# Altium PCB PCB_Gateway_RS232-Wifi_ESP8266.PcbDoc
Units mil, origin at the board's own origin, x right, y up, seen from the top; angles counter-clockwise.
Board outline 2130.91 x 3155.51 mil, 2 copper layers (Top Layer, Bottom Layer); 28 components, 22 nets, 104 pads, 6 vias.
Unrouted connection lines stored in the file: 1.
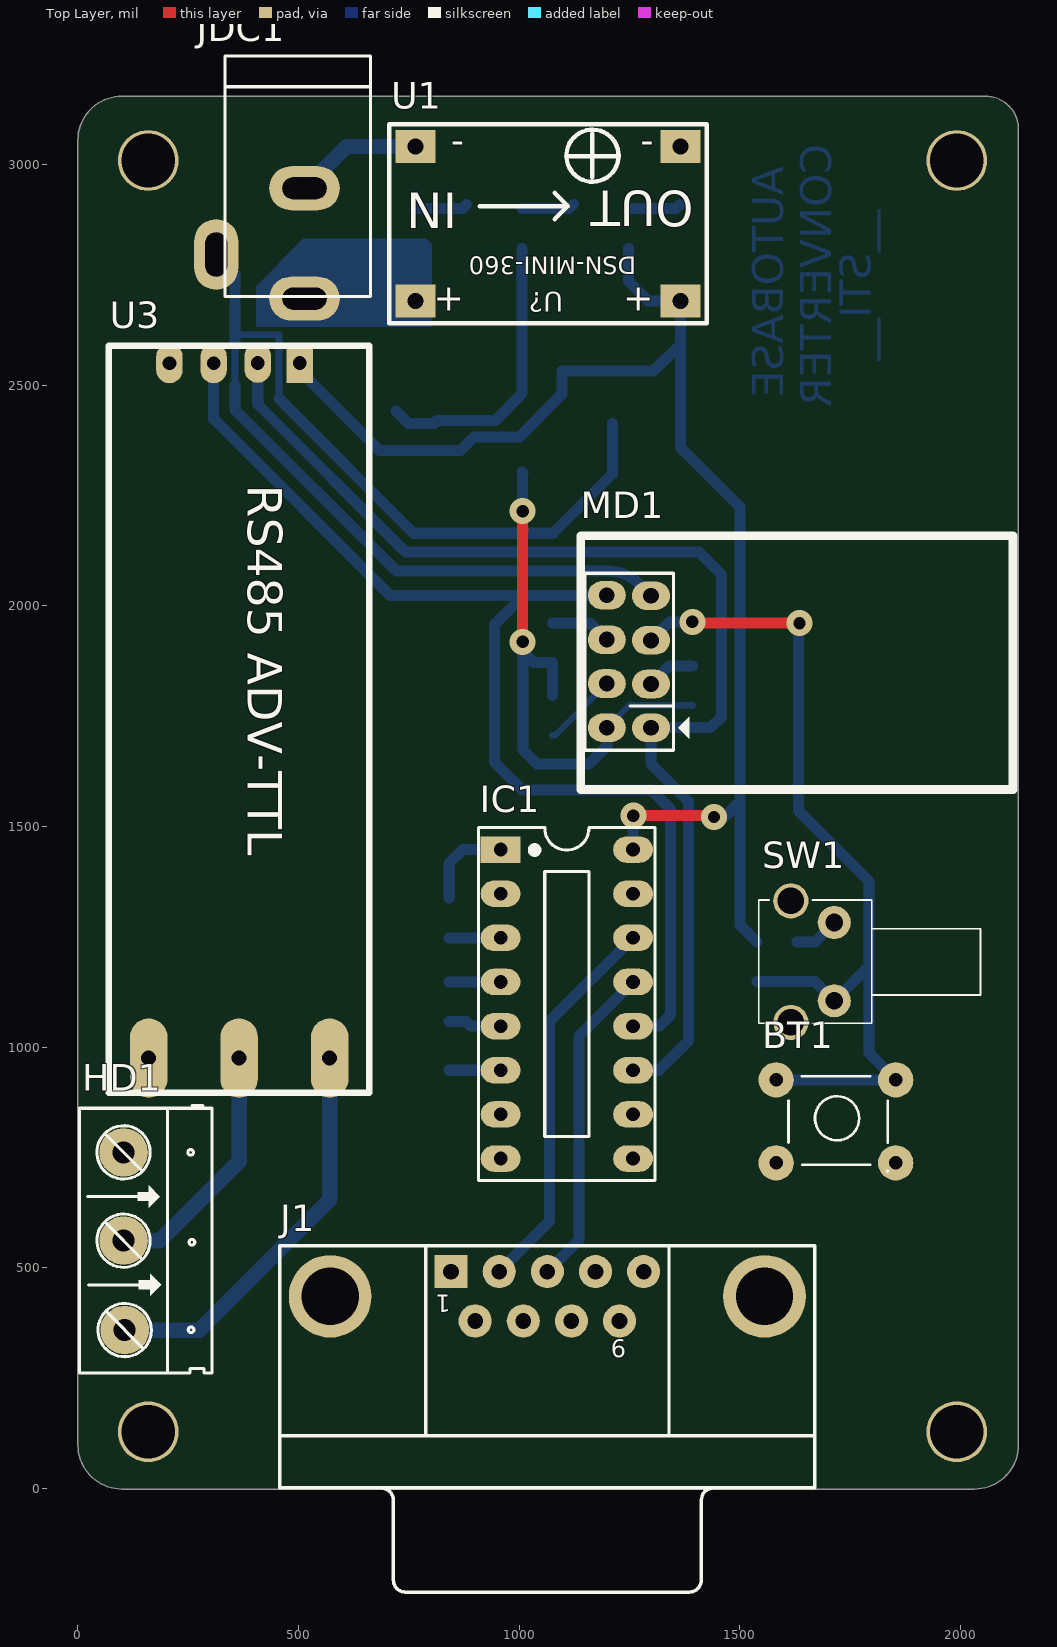
[diagram p0: Top Layer view]
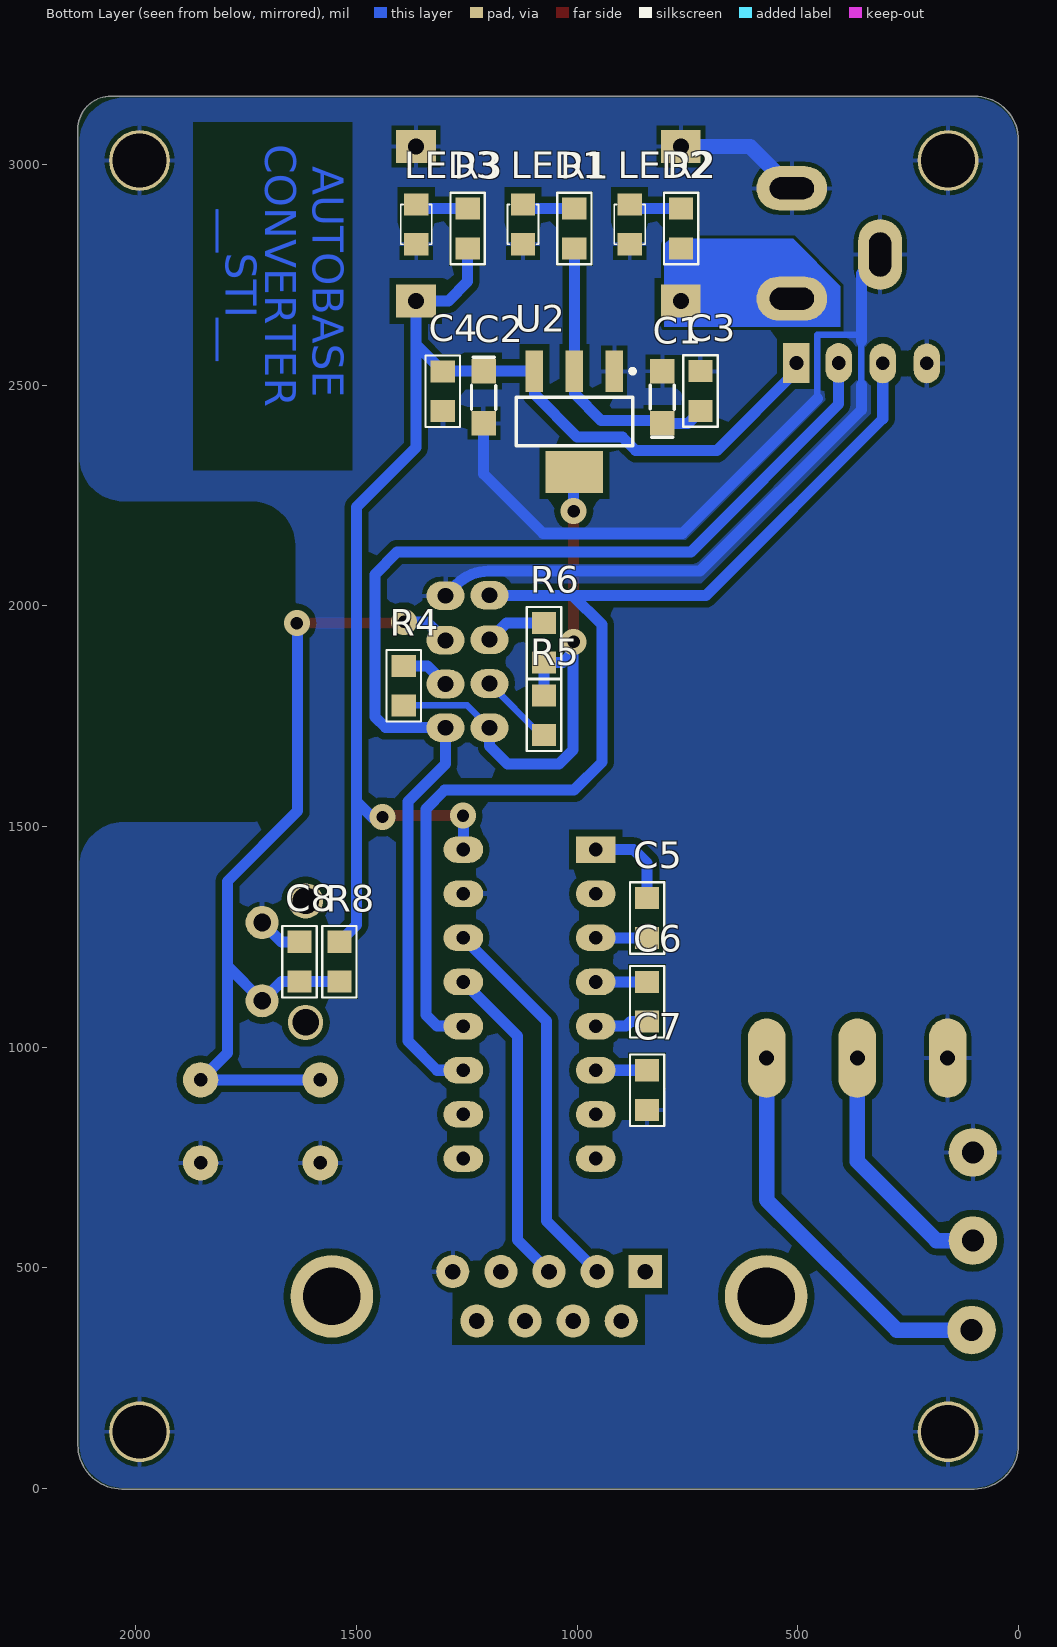
[diagram p1: Bottom Layer view, seen from below]
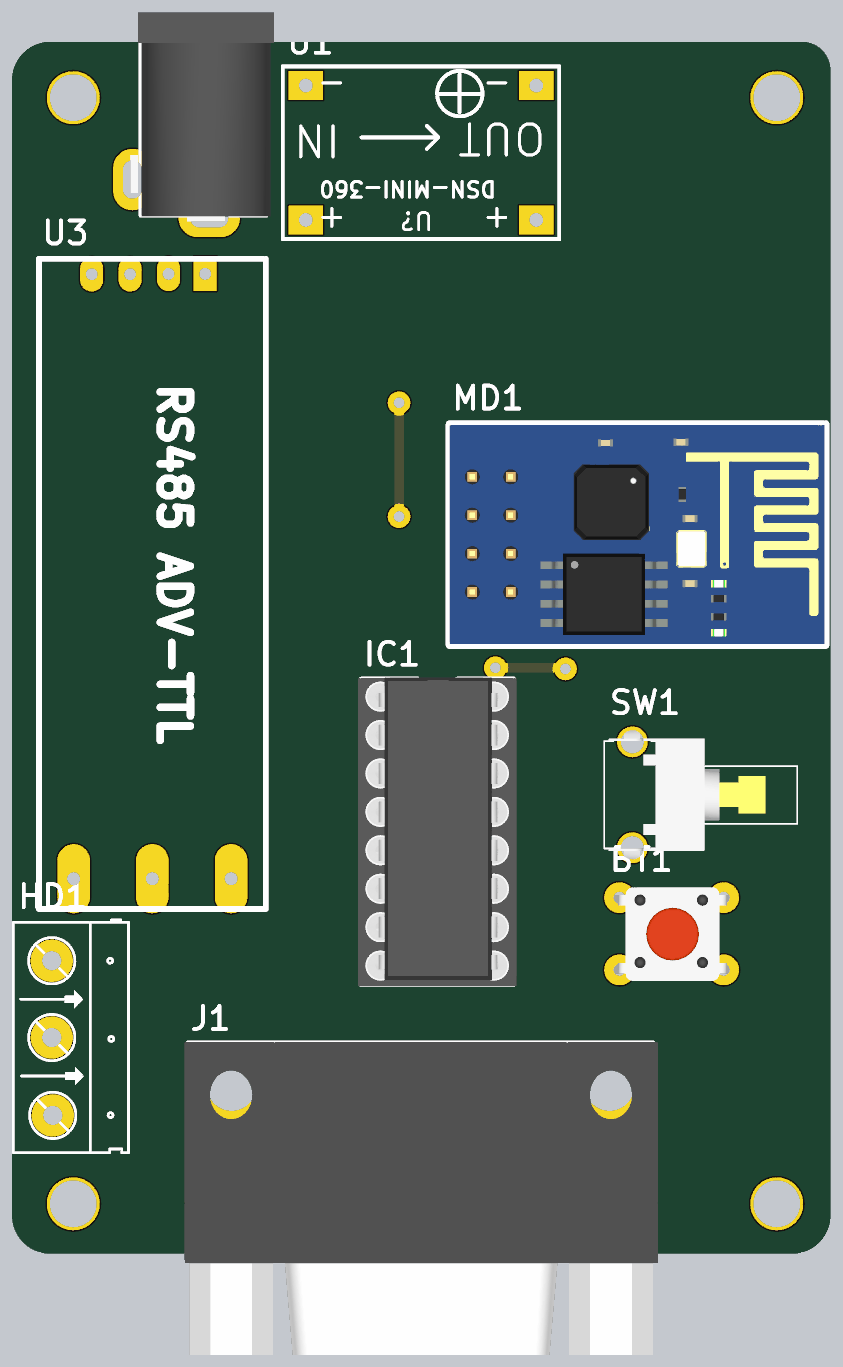
[diagram p2: 3D render of the assembled board from above, using the file's embedded part models]
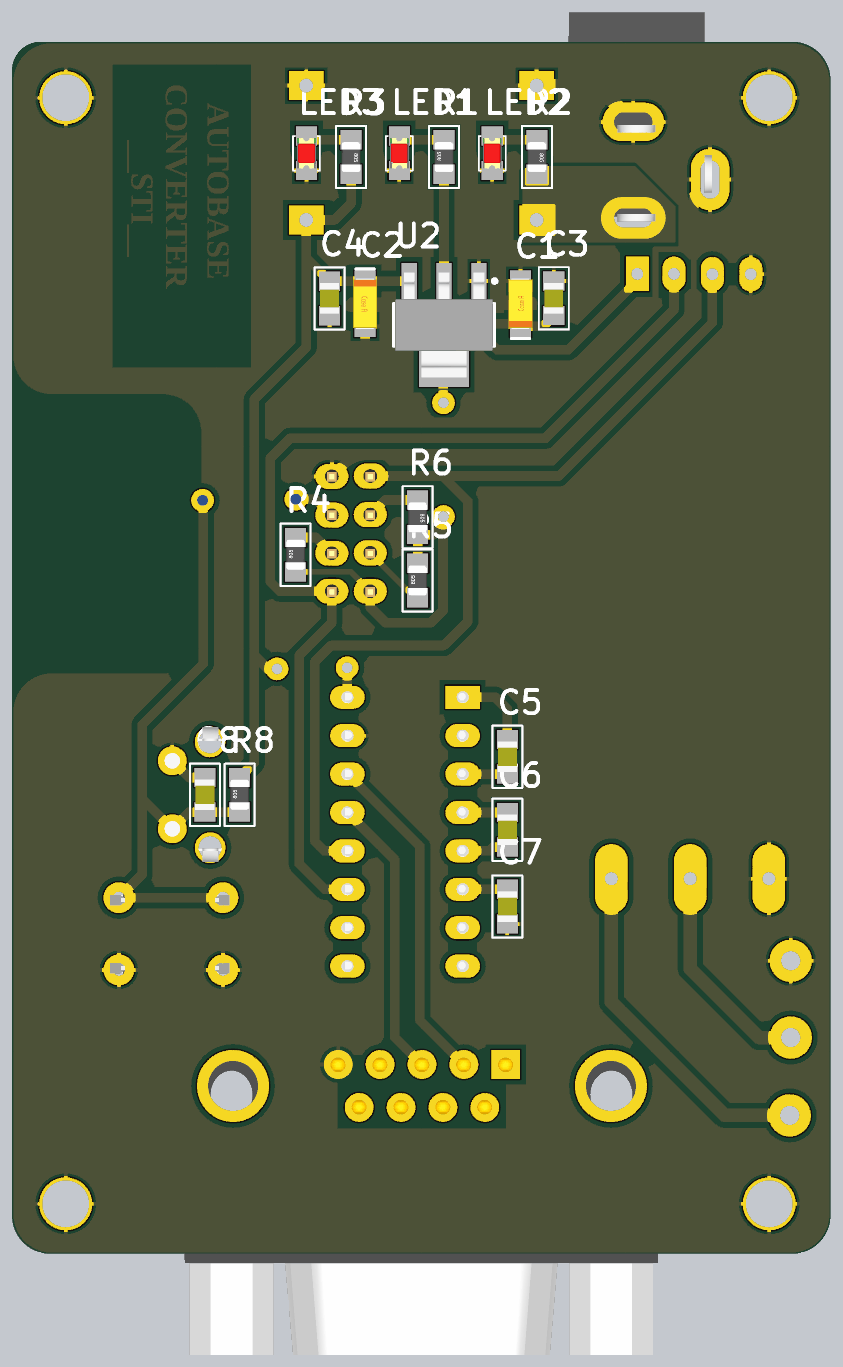
[diagram p3: 3D render of the assembled board from below, using the file's embedded part models]

## Layer stack, top to bottom
Top Solder: solder mask 0.4, Solder Resist, Dk 3.5
Top Layer: signal copper 1.4
Dielectric 1: dielectric 12.6, FR-4, Dk 4.8
Bottom Layer: signal copper 1.4
Bottom Solder: solder mask 0.4, Solder Resist, Dk 3.5

## Board outline
0,3054.53 cw(c100,3054.53) 100,3154.53 2056.1,3154.53 cw(c2056.1,3079.72) 2130.91,3079.72 2130.91,99.02 cw(c2030.91,99.02) 2030.91,-0.98 100,-0.98 cw(c100,99.02) 0,99.02

## Design rules (kind name [scope] priority, off if disabled: settings)
Clearance [All] p1: gap=8 ignorepadtopadclearanceinfootprint=FALSE except(15: Arc-Poly Track-Poly SMDPad-Poly THPad-Poly Via-Poly Fill-Poly Poly-Poly)
PolygonConnect [All] p1: connectstyle=Relief reliefconductorwidth=10 reliefentries=4 polygonreliefangle="90 Angle" airgapwidth=10
RoutingVias [All] p1: holewidth=28 width=50 viastyle="Through Hole" minholewidth=28 minwidth=50 maxholewidth=28 maxwidth=50
SolderMaskExpansion [All] p1: expansion=4
Width [All] p1: maxlimit=35 minlimit=15 preferedwidth=25
30 further rules are at their usual default settings.

## Components (designator, comment, footprint, x,y, rotation, side; value= is the part's Value field where it differs from the comment)
BT1 "BT" SW4 1594.82,934.06 r0 top
C1 "10uF" "C tantalum 3216-18" 807.09,2472.44 r90 bottom
C2 "2.2uF" "C tantalum 3216-18" 1211.61,2472.44 r270 bottom
C3 "33pF" C-0805 720.47,2486.5 r90 bottom value=100pF
C4 "100nF" C-0805 1304.13,2486.22 r270 bottom value=100pF
C5 "100nF" C-0805 841.34,1292.83 r270 bottom value=100pF
C6 "100nF" C-0805 841.34,1102.83 r270 bottom value=100pF
C7 "100nF" C-0805 841.34,902.83 r270 bottom value=100pF
C8 "100nF" C-0805 1628.94,1193.9 r90 bottom value=100pF
HD1 "Header 3" HED3 103.45,761.81 r270 top
IC1 "MAX232" DIP16/W0.3 957.68,1447.83 r270 top
J1 "DRB-09P11G1R" DB9_MALE 899.96,379.92 r180 top
JDC1 "Jac DC" DC0 413.39,2820.87 r270 top
LED1 "LED" LED-0805-Red 1122.53,2909.14 r270 bottom value="LED 3 - 5 ly 2 Colour"
LED2 "LED" LED-0805-Red 880.73,2909.14 r270 bottom value="LED 3 - 5 ly 2 Colour"
LED3 "LED" LED-0805-Red 1364.33,2909.14 r270 bottom value="LED 3 - 5 ly 2 Colour"
MD1 "ESP8266" ESP2866 1298.23,1723.83 r90 top
R1 "1K" R-0805 1006.13,2854.64 r90 bottom
R2 "1K" R-0805 764.33,2854.64 r270 bottom
R3 "1K" R-0805 1247.93,2854.64 r270 bottom
R4 "1K" R-0805 1392.72,1818.9 r90 bottom
R5 "1K" R-0805 1074.8,1751.97 r90 bottom
R6 "1K" R-0805 1074.8,1916.34 r270 bottom
R8 "10K" R-0805 1538.39,1193.9 r90 bottom
SW1 "SW" SW1-DIP 1713.58,1105.28 r90 top value="SW chip 2 pin"
U1 "Buck Mini 360" "Buck Mini 360" 1104.96,2840.59 r180 top
U2 "LM1117 3.3V" "IC PACKGE SOT223_N" 1006.13,2417.32 r270 bottom
U3 "*RS485_ADV" RS485_ADV-TTL 660.43,2589.57 r270 top

## Footprints (in the part's own frame and the unit in brackets; to place one, negate y for a bottom-side part, rotate by r counter-clockwise, add the part's x,y. Pads: shape width x height; smd on the part's side, far side on the other; paste and mask are expansions set on the pad)
"Buck Mini 360" [mil]
  rect 90x75 hole 36: 1(-260,150) 2(-260,-200) 3(340,150) 4(340,-200)
  silkscreen extent -320,-250 400,200
"C tantalum 3216-18" [mm]
  rect 1.4x1.4 smd: 1(-1.5,0) 2(1.5,0)
  silkscreen extent -2.3,-0.7 0.69,0.7, body extent -1.7,-0.8 1.7,0.8, height 1.65
C-0805 [mil] "Compoment SMD 80x50mil"
  rect 50x55 smd: 1(-45,0) 2(45,0)
  silkscreen extent -81,-39 81,39, body extent -40,-25 40,25, height 24
DB9_MALE [mm]
  rect 1.905x1.905 hole 0.9: 1(1.385,-2.84)
  round 1.905 hole 0.9: 2(-1.385,-2.84) 3(-4.155,-2.84) 4(-6.925,-2.84) 6(0,0) 7(-2.77,0) 8(-5.54,0) 9(-8.31,0)
  round 1.905 hole 0.9 mask+0: 5(-9.695,-2.84)
  round 4.76 hole 3.3: 10(-16.65,-1.42) 11(8.34,-1.42)
  silkscreen extent -19.56,-4.32 11.24,15.6, body extent -19.85,-4.33 11.47,16.38, height 12.66
DC0 [mil] "Jac DC input"
  oval 100x160 hole 50 slot 100 at 90 deg: 1(125,100) 2(-125,100)
  oval 160x100 hole 50 slot 100 at 0 deg: 3(25,-100)
  silkscreen extent -425,-80 120,250, body extent -410,-105 134,269, height 434
DIP16/W0.3 [mil] "16 PIN, W 300mil, Pin to pin 100mil"
  rect 60x90 hole 31: 1(0,0)
  oval 60x90 hole 31: 2(100,0) 3(200,0) 4(300,0) 5(400,0) 6(500,0) 7(600,0) 8(700,0) 9(700,300) 10(600,300) 11(500,300) 12(400,300) 13(300,300) 14(200,300) 15(100,300) 16(0,300)
  silkscreen extent -50,-50 750,350, body extent -52,-57 752,356, height 299
ESP2866 [mil]
  oval 65x86 hole 36: 1(0,0) 2(99,0) 3(198,0) 4(299,0) 5(0,100) 6(100,100) 7(199.5,100) 8(300,100)
  silkscreen extent -140,-820 435,159, body extent -137,-817 433,159, height 231
HED3 [mil] "Header 3, 3 pin, hight 300mil, Pin to Pin 200, Colour Green"
  round 110 hole 50: 1(0,0) 2(200,0) 3(402.62,2.62)
  silkscreen extent -106,-100 500,200
"IC PACKGE SOT223_N" [mm] "SOT223, 4-Leads, Body 6.5x3.5mm, Pitch 2.3mm, Lead Span 7mm, IPC Medium Density"
  rect 2.4x1 smd: 1(-2.9,2.3) 2(-2.9,0) 3(-2.9,-2.3)
  rect 2.4x3.3 smd: 4(2.9,0)
  silkscreen extent -3.02,-3.35 1.4,3.47, body extent -3.47,-3.25 3.47,3.25, height 1.68
LED-0805-Red [mil]
  rect 50x55 smd: 1(0,0) 2(90,0)
  silkscreen extent 0,-35 90,35, body extent 5,-25 85,25, height 43
R-0805 [mil] "Compoment SMD 80x50mil"
  rect 50x55 smd: 1(-45,0) 2(45,0)
  silkscreen extent -81,-39 81,39, body extent -39,-25 39,25, height 31
RS485_ADV-TTL [mil] "RS485 Module"
  rect 90x60 hole 31: 1(39.37,-157.48)
  oval 90x60 hole 31: 2(39.37,-252.95) 3(40.37,-352.95) 4(40.37,-452.95)
  oval 180x85 hole 34: 5(1614.17,-500) 6(1614.17,-295.28) 7(1614.17,-90)
  silkscreen extent 0,-591 1693,0
SW1-DIP [mil]
  round 75 hole 40: 1(0,0) 2(177.16,0)
  round 80 hole 60: ""(-49.21,98.42) ""(226.38,98.42)
  silkscreen extent -51,-331 228,171, body extent -87,-398 265,160, height 283
SW4 [mil] "SW button 4pin, 250 x250 mil"
  round 80 hole 31: 1(-13,-8) 1(258,-8) 2(-13,-196) 2(258,-196)
  silkscreen extent 15,-215 240,0, body extent -31,-225 281,19, height 276

## Part data
BT1: library part BUTTON
C1 C2: library part "C Tantalum SMD 3216", "Midget Conformal Coated Solid Tantalum Chip Capacitor", ComponentLink1Description="Manufacturer Link", ComponentLink1URL=http://www.vishay.com/, ComponentLink2Description=Datasheet, ComponentLink2URL=http://www.vishay.com/docs/40000/194d.pdf, DatasheetDocument=05-Jul-2002, Note="See Data Sheet for full range of components", PackageReference=A, Published=19-Mar-2004, Publisher="Altium Limited"
C3 C4 C5 C6 C7 C8: library part "Cap Ceramic", "Capacitor (Semiconductor SIM Model)", LatestRevisionDate=29-May-2009, LatestRevisionNote="IPC-7351 Footprint Added.", PackageDescription="Chip Capacitor", PackageReference=C1206, Published=8-Jun-2000, Publisher="Altium Limited"
HD1: library part Hed3, "Header 3 (Green)"
IC1: "Dual EIA-232 Driver/Receiver"
J1: library part "CON 9 Male", "Connector, DB9 R/A Through-hole Male", Max Current=3A, Category=Connector, Connector type=Header, Mounting Technology=Through-Hole, Pin Count=9, Status=Unreleased
JDC1: library part DCIN, "Jac DC input"
LED1 LED2 LED3: library part "LED SMD"
R1 R2 R3 R4 R5 R6 R8: library part RES, "Rectangular Thick Film Chip Resistor, 10 Ohm to 1M Ohm Range, 0.1% and 0.5% Tolerance, 1/8W", PackageDocument=Mar-2003, Code_IPC="2012 [0805]", ComponentLink1Description="Manufacturer Link", ComponentLink1URL=http://www.panasonic.com/industrial/components/resistive_products.htm, ComponentLink2Description=Datasheet, ComponentLink2URL=http://www.panasonic.com/industrial/components/pdf/AOA0000CE8.pdf, LatestRevisionDate=19-Mar-2004, LatestRevisionNote="Silkscreen size reduced.", Note="If flow soldering, adjust pad width of PCB Footprint to 0.7 - 0.8 times the width of the resistor.", PackageReference=ERA-0805, Published=17-Dec-2003, Publisher="Altium Limited"
SW1: library part SW2, "Switch button 2 pin"
U2: library part "IC POWER LM1117MPX-3.3", "800mA Low-Dropout Linear Regulator, 4-pin SOT-223", Manufacturer="National Semiconductor", PackageTopMarking=XYTT*N05A, PartNumber=LM1117MPX-3.3, PowerWise=N, Supplier Part Number 1=1652313, Code_IPC=SOT223-4, Code_JEDEC=TO-261-AA, ComponentLink1Description="LM1117 Datasheet", ComponentLink1URL=http://www.national.com/ds/LM/LM1117.pdf, ComponentLink2Description="LM1117 Web Page", ComponentLink2URL=http://www.national.com/pf/LM/LM1117.html, ComponentLink3Description="MP04A Package Page", ComponentLink3URL=http://www.national.com/packaging/folders/mp04a.html, CompType="LDO IC", DatasheetVersion=Apr-2006, PackageDescription="Molded SOT-223, 6.50 x 3.56 x 1.6mm Body, 4 Lead, 2.3mm Pitch", PackageReference=MP04A, PackageVersion="revB, Apr-2003", PinCount=4, Published=1-Mar-2010, Publisher="Altium Limited", RoHS=N, Supplier 1=Farnell
U3: library part RS485_ADV-TTL, "Module RS485"

## Free pads (board coordinates)
  round 137.8 hole 122.05: 2(159.45,3008.86) 3(1991.14,3008.86) 4(1991.14,128.94) 5(159.45,128.94)

## Via types
v1: diameter 59.06, hole 28, Top Layer to Bottom Layer, 6 vias

## Nets (pads, with @x,y where several pads share a name; then routed paths per layer and width w, separated by ;. In a path a pad name is that pad's centre, name@x,y a point inside that pad or via, vN(x,y) a via of type N, cw(c..) or ccw(c..) an arc to the next point about the centre after c; other vN are vias at no path point)
GND: BT1.2 C1.2 C2.2 C3.2 C4.2 C7.2 C8.2 HD1.1 IC1.15 J1.5 JDC1.2 JDC1.3 LED1.2 LED2.2 LED3.2 MD1.4 pad.2 pad.3 pad.4 pad.5 SW1.2 U1.2 U1.4 U2.1 U3.4 U3.5 | length 3111.9
  Bottom Layer w15: 356.02,2500 356.02,2600.39 ; 356.02,2614.42 455.71,2614.42 455.71,2469.49
  Bottom Layer w25: 356.02,2500 356.02,2444.18 721.46,2078.74 1200.9,2078.74 cw(c1200.9,1978.74) 1271.61,2049.45 MD1.4 ; 356.02,2600.39 356.02,2614.42 JDC1.3@356.02,2753.23 ; 455.71,2469.49 760.83,2164.37 1076.77,2164.37 1211.61,2299.21 C2.2 ; C8.2 1670.04,1238.9 SW1.2
  Bottom Layer w35: JDC1.2 608.11,3040.59 U1.4
MCU_RX: IC1.12 MD1.8 U3.3 | length 2592.1
  Bottom Layer w25: U3.3 307.48,2423.82 707.46,2023.83 1010.06,2023.83 ; MD1.8 1010.06,2023.83 ; IC1.12 1317.52,1047.83 1342.52,1072.83 1342.52,1539.96 1299.8,1582.68 1006.89,1582.68 943.9,1645.67 943.9,1957.68 1010.06,2023.83
MCU_TX: IC1.11 MD1.1 U3.2 | length 2694.4
  Bottom Layer w25: U3.2 407.48,2456.69 742.13,2122.05 1407.48,2122.05 1458.14,2071.39 1458.14,1748.5 1433.48,1723.83 MD1.1 1298.23,1641.73 1382.87,1557.09 1382.87,1013.78 1316.93,947.83 IC1.11
NetC5_1: C5.1 IC1.1 | length 208.4
  Bottom Layer w25: C5.1 841.34,1417.13 872.05,1447.83 IC1.1
NetC5_2: C5.2 IC1.3 | length 116.3
  Bottom Layer w25: C5.2 IC1.3
NetC6_1: C6.1 IC1.4 | length 116.3
  Bottom Layer w25: C6.1 IC1.4
NetC6_2: C6.2 IC1.5 | length 120.5
  Bottom Layer w25: C6.2 879.17,1057.83 889.17,1047.83 IC1.5
NetC7_1: C7.1 IC1.6 | length 116.3
  Bottom Layer w25: C7.1 IC1.6
NetHD1_2: HD1.2 U3.6 | length 570.2
  Bottom Layer w35: HD1.2 185.83,561.81 365.16,741.14 U3.6
NetHD1_3: HD1.3 U3.7 | length 907.8
  Bottom Layer w35: HD1.3 275.53,359.19 570.43,654.09 U3.7
NetJDC1_1: JDC1.1 R2.2 U1.3 | length 119.3
  Bottom Layer w25: R2.2 764.96,2809.01 U1.3
NetLED1_1: LED1.1 R1.2 | length 120.3
  Bottom Layer w25: R1.2 1113.03,2899.64 LED1.1
NetLED2_1: LED2.1 R2.1 | length 120.3
  Bottom Layer w25: R2.1 871.23,2899.64 LED2.1
NetLED3_1: LED3.1 R3.1 | length 120.3
  Bottom Layer w25: R3.1 1354.83,2899.64 LED3.1
NetMD1_2: MD1.2 R4.2 | length 111.5
  Bottom Layer w25: MD1.2 1339.29,1863.9 R4.2
NetMD1_6: MD1.6 R5.1 | length 171.8
  Bottom Layer w15: R5.1 1081.36,1706.97 MD1.6
NetMD1_7: MD1.7 R6.1 | length 139.2
  Bottom Layer w25: R6.1 1160.22,1961.34 MD1.7
RS232_IN: IC1.13 J1.3 | length 736.5
  Bottom Layer w25: J1.3 1134.84,563.03 1134.84,1025 IC1.13
RS232_OUT: IC1.14 J1.2 | length 881.7
  Bottom Layer w25: J1.2 1068.9,606.14 1068.9,1059.06 IC1.14
SW_CONFIG: BT1.1 C8.1 MD1.3 R8.1 SW1.1 | length 2056
  Top Layer w25: v1(1392.01,1963.58) v1@1394.96,1963.58 ; v1@1394.96,1960.63 v1(1634.84,1960.63)
  Bottom Layer w25: MD1.3 1339.98,1963.58 v1(1392.01,1963.58) ; R8.1 C8.1 1669.96,1148.9 SW1.1 1792.32,1184.02 ; BT1.1@1581.82,926.06 1852.82,926.06 1792.32,986.55 1792.32,1184.02 ; v1(1634.84,1960.63) 1632.87,1958.66 1632.87,1535.43 1792.32,1375.98 1792.32,1184.02
VCC3.3: C1.1 C3.1 MD1.5 R1.1 R4.1 R5.2 R6.2 U2.2 U2.4 | length 1955.1
  Top Layer w25: v1(1007.66,1918.31) v1(1007.66,2214.57) 1007.66,2173.44 1007.87,2173.23
  Bottom Layer w15: MD1.5 1249,1774.61 1392.01,1774.61 R4.1
  Bottom Layer w25: C3.1 748.58,2413.39 C1.1 813.98,2420.28 945.87,2420.28 1006.13,2480.54 U2.2 R1.1 ; v1@1005.91,1918.31 v1(1007.66,1918.31) 1007.66,1896.16 v1@1008.86,1894.96 ; U2.4 1007.87,2301.41 1007.66,2301.19 v1(1007.66,2214.57) ; R5.2 R6.2 1032.48,1871.34 v1@1008.86,1894.96 ; MD1.5 1198.23,1682.48 1157.48,1641.73 1040.51,1641.73 1008.86,1673.39 v1@1008.86,1894.96
VCC5: C2.1 C4.1 IC1.16 R3.2 R8.2 U1.1 U2.3 U3.1 | length 3198.9
  Top Layer w25: v1(1258.46,1524.61) 1450.97,1524.61 1453.93,1521.65 v1(1440.94,1521.65)
  Bottom Layer w25: U3.1 502.95,2532.48 683.07,2352.36 867.13,2352.36 897.64,2382.87 1000,2382.87 1096.68,2479.56 U2.3 C2.1 1304.41,2531.5 1364.96,2592.05 ; R3.2 1247.93,2734.35 1291.69,2690.59 U1.1 1364.96,2592.05 ; IC1.16 1257.68,1525.39 v1(1258.46,1524.61) ; v1(1440.94,1521.65) 1452.99,1521.65 1457.91,1526.57 v1@1463.7,1520.78 ; v1@1451.31,1520.67 1451.42,1520.78 v1@1463.7,1520.78 ; v1@1462.6,1519.69 v1@1463.7,1520.78 ; R8.2 1500,1277.28 1500,1557.09 ; 1364.96,2592.05 1364.96,2358.46 1500,2223.43 1500,1557.09 ; v1@1463.7,1520.78 1500,1557.09
pads on no net: IC1.2 IC1.7 IC1.8 IC1.9 IC1.10 J1.1 J1.4 J1.6 J1.7 J1.8 J1.9 J1.10 J1.11 SW1.

## Polygon pours and split planes (outlines as drawn)
GND on Bottom Layer "GND_BOT" (solid, pour order 6): 2026.97,3150.59 cw(c2026.97,3050.59) 2126.97,3050.59 2126.97,2337.2 cw(c2026.97,2337.2) 2026.97,2237.2 1737.8,2237.2 ccw(c1737.8,2137.2) 1637.8,2137.2 1637.8,1609.84 ccw(c1737.8,1609.84) 1737.8,1509.84 2026.97,1509.84 cw(c2026.97,1409.84) 2126.97,1409.84 2126.97,101.97 cw(c2026.97,101.97) 2026.97,1.97 102.95,1.97 cw(c102.95,101.97) 2.95,101.97 2.95,3050.59 cw(c102.95,3050.59) 102.95,3150.59

## Other copper
Bottom Layer:
  pour cut-out: 1664.37,1267.72 1664.37,1148.9 1769.69,1148.9 1769.69,1267.72
  pour cut-out: 1137.8,524.04
  pour cut-out: 1282.45,488.19 845.43,488.19 845.43,324.8 1284.04,324.8
  region net GND: 981.3,1498.03
  pour cut-out: 1508.86,3095.51 1869.09,3095.44 1869.09,2307.09 1508.86,2307.09
  region net NetJDC1_1: 802.17,2818.9 789.37,2831.69 510.83,2831.69 403.54,2724.41 403.54,2631.89 802.17,2631.89
  text "CONVERTER" at 1730.42,3045.22 h120 r90
  text "AUTOBASE" at 1622.15,2995.78 h120 r90
  text "__STI__" at 1819.99,2897.57 h120 r90

## Silkscreen, mask and mechanical layers (free items; w line width, h text height)
Mechanical 1:
  lines w10: 0,49.02 ccw(c50,49.02) 50,-0.98 2080.91,-0.98 ccw(c2080.91,49.02) 2130.91,49.02 2130.91,3104.53 ccw(c2080.91,3104.53) 2080.91,3154.53 1137.8,3154.53 50,3154.53 ccw(c50,3104.53) 0,3104.53 0,49.02

## Text inside footprints (layer, text, board x,y; h text height)
J1: Top Overlay "1" at 844.84,438.98 h39.37 r180; Top Overlay "9" at 1242.84,336.81 h39.37 r180
U1: Top Overlay "-" at 1304.96,3070.59 h60 r180; Top Overlay "-" at 874.96,3070.59 h60 r180; Top Overlay "+" at 874.96,2720.59 h60 r180; Top Overlay "+" at 1304.96,2720.59 h60 r180; Top Overlay "OUT" at 1394.96,2940.59 h80 r180; Top Overlay "IN" at 859.96,2935.59 h80 r180; Top Overlay "DSN-MINI-360" at 1264.96,2790.59 h40 r180; Top Overlay "U?" at 1099.96,2710.59 h45 r180
U3: Top Overlay "RS485 ADV-TTL" at 384.84,2274.61 h78.74 r270